# Altium PCB micromouse.PcbDoc (part 1 of 2)
Units mm, origin at the board's own origin, x right, y up, seen from the top; angles counter-clockwise.
Board outline 70.05 x 99.97 mm, 2 copper layers (Top, Bottom); 176 components, 116 nets, 553 pads, 232 vias.
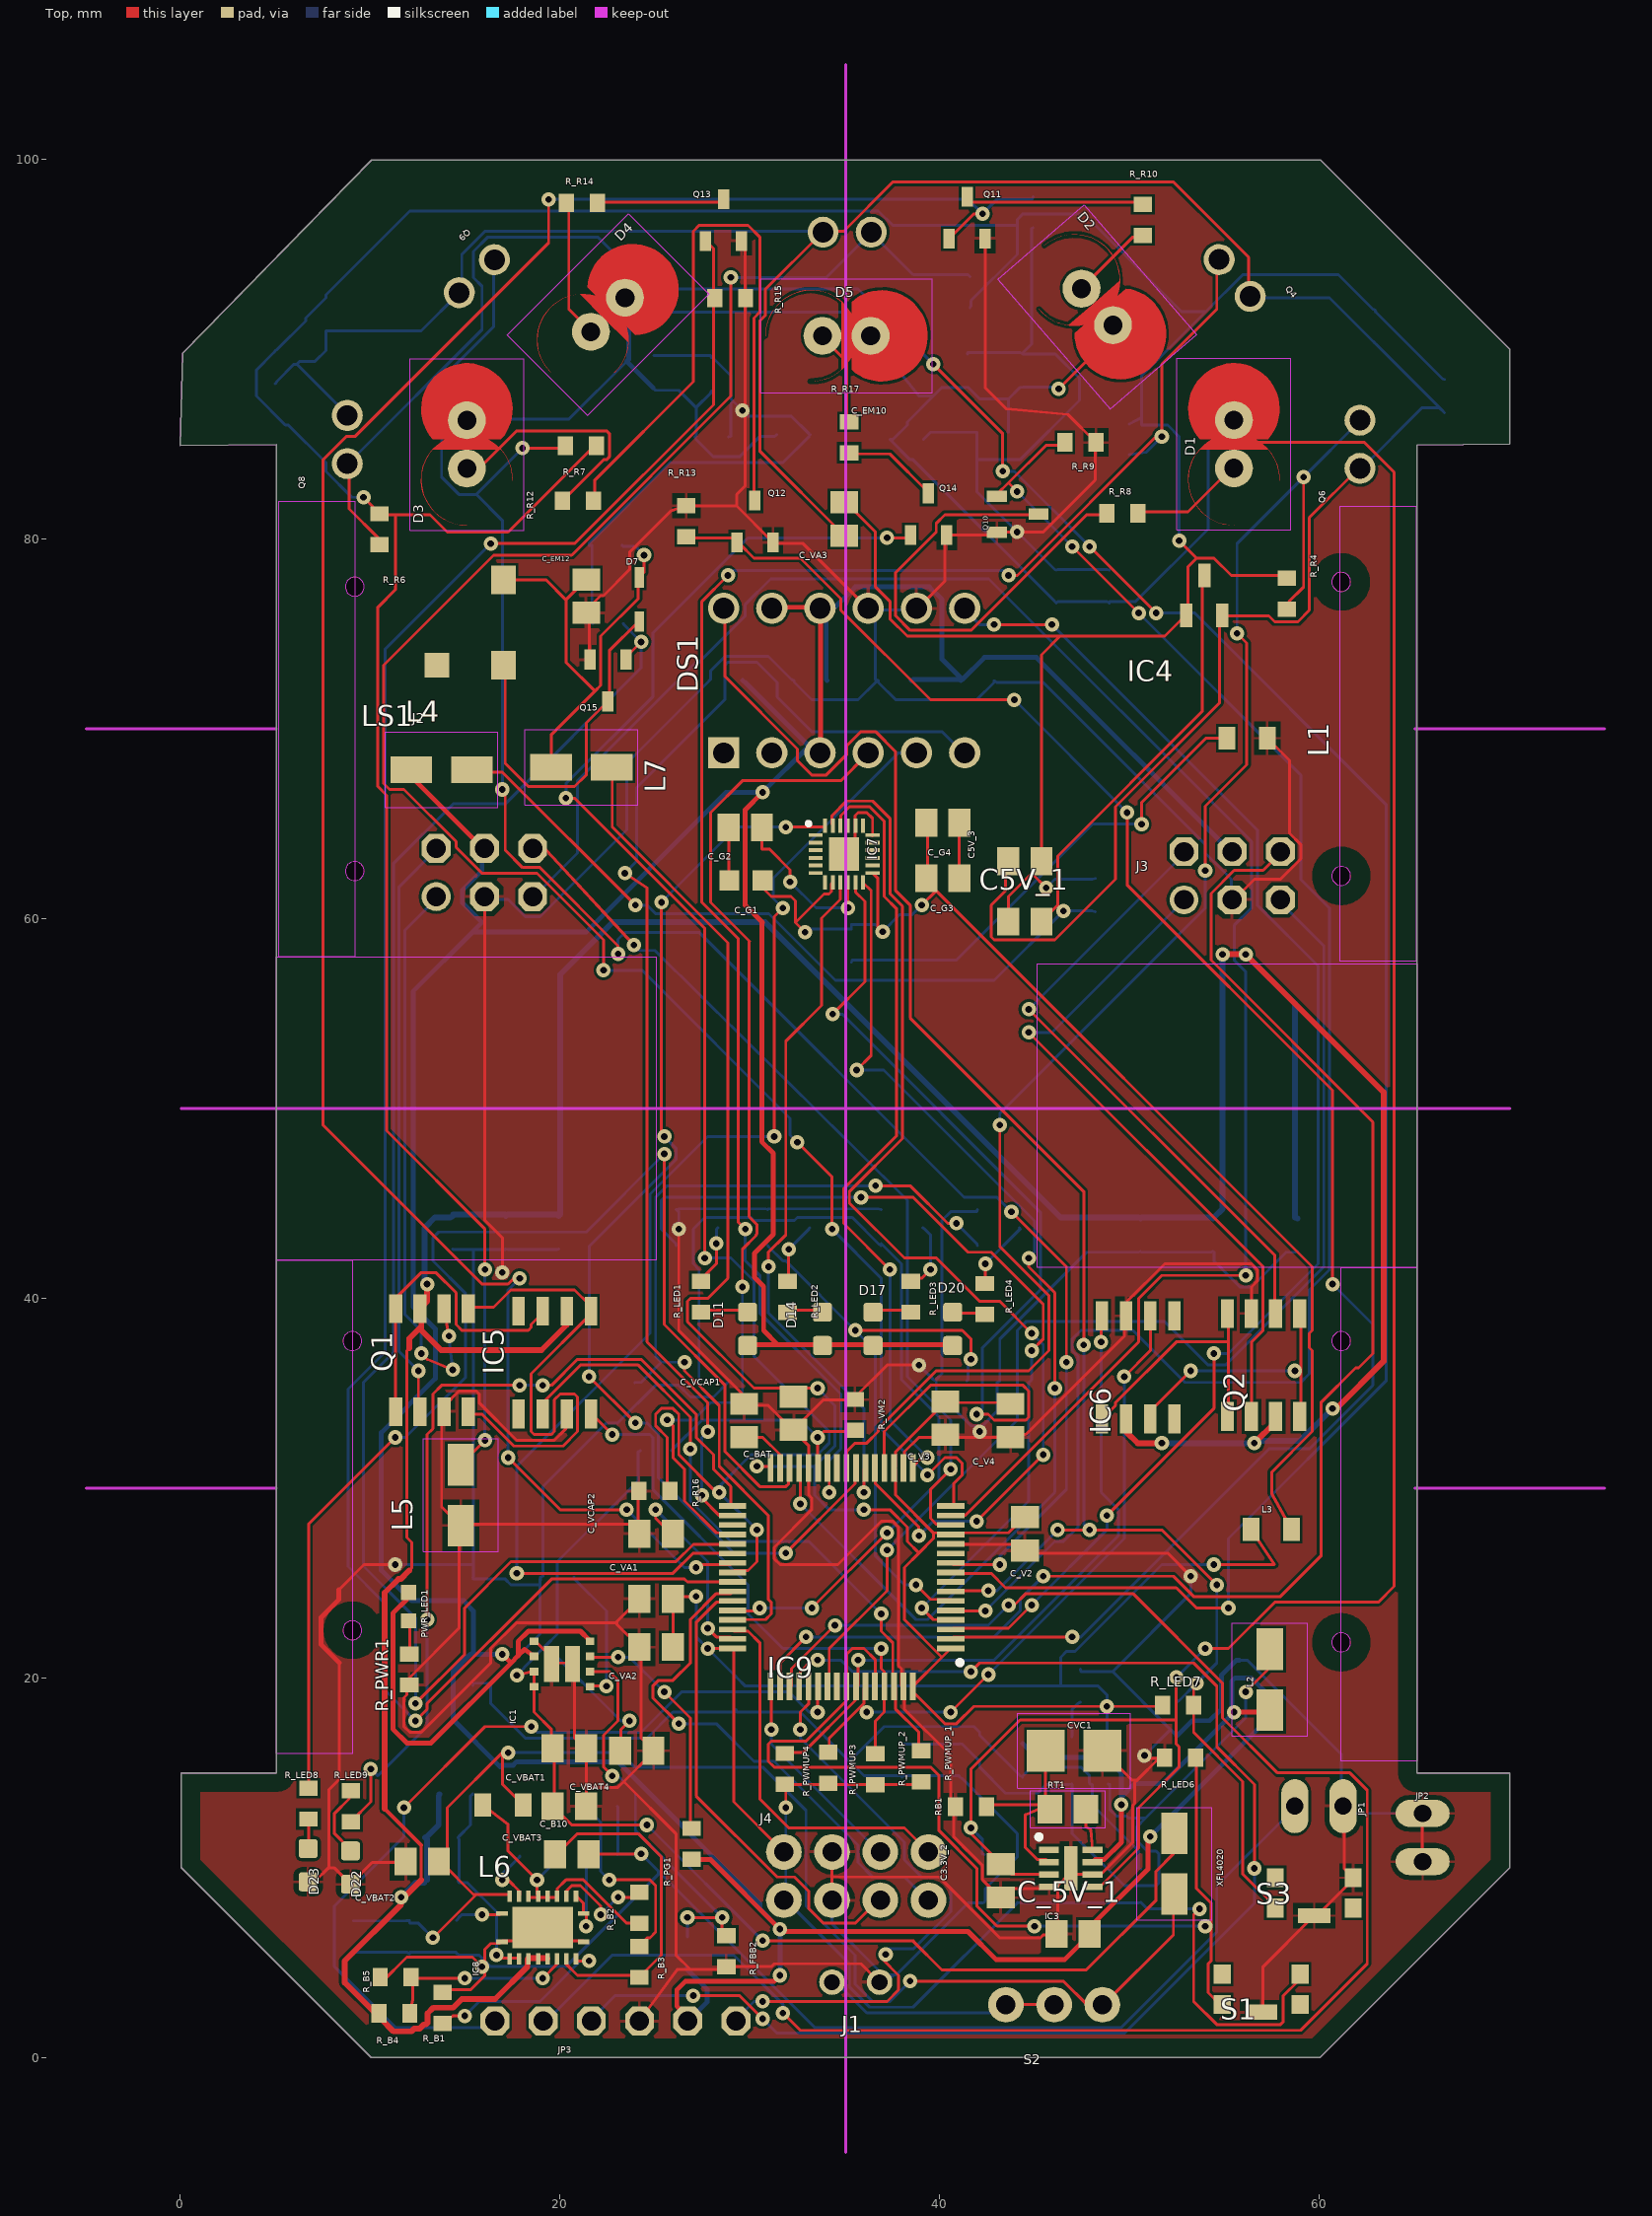
[diagram p0: Top view]
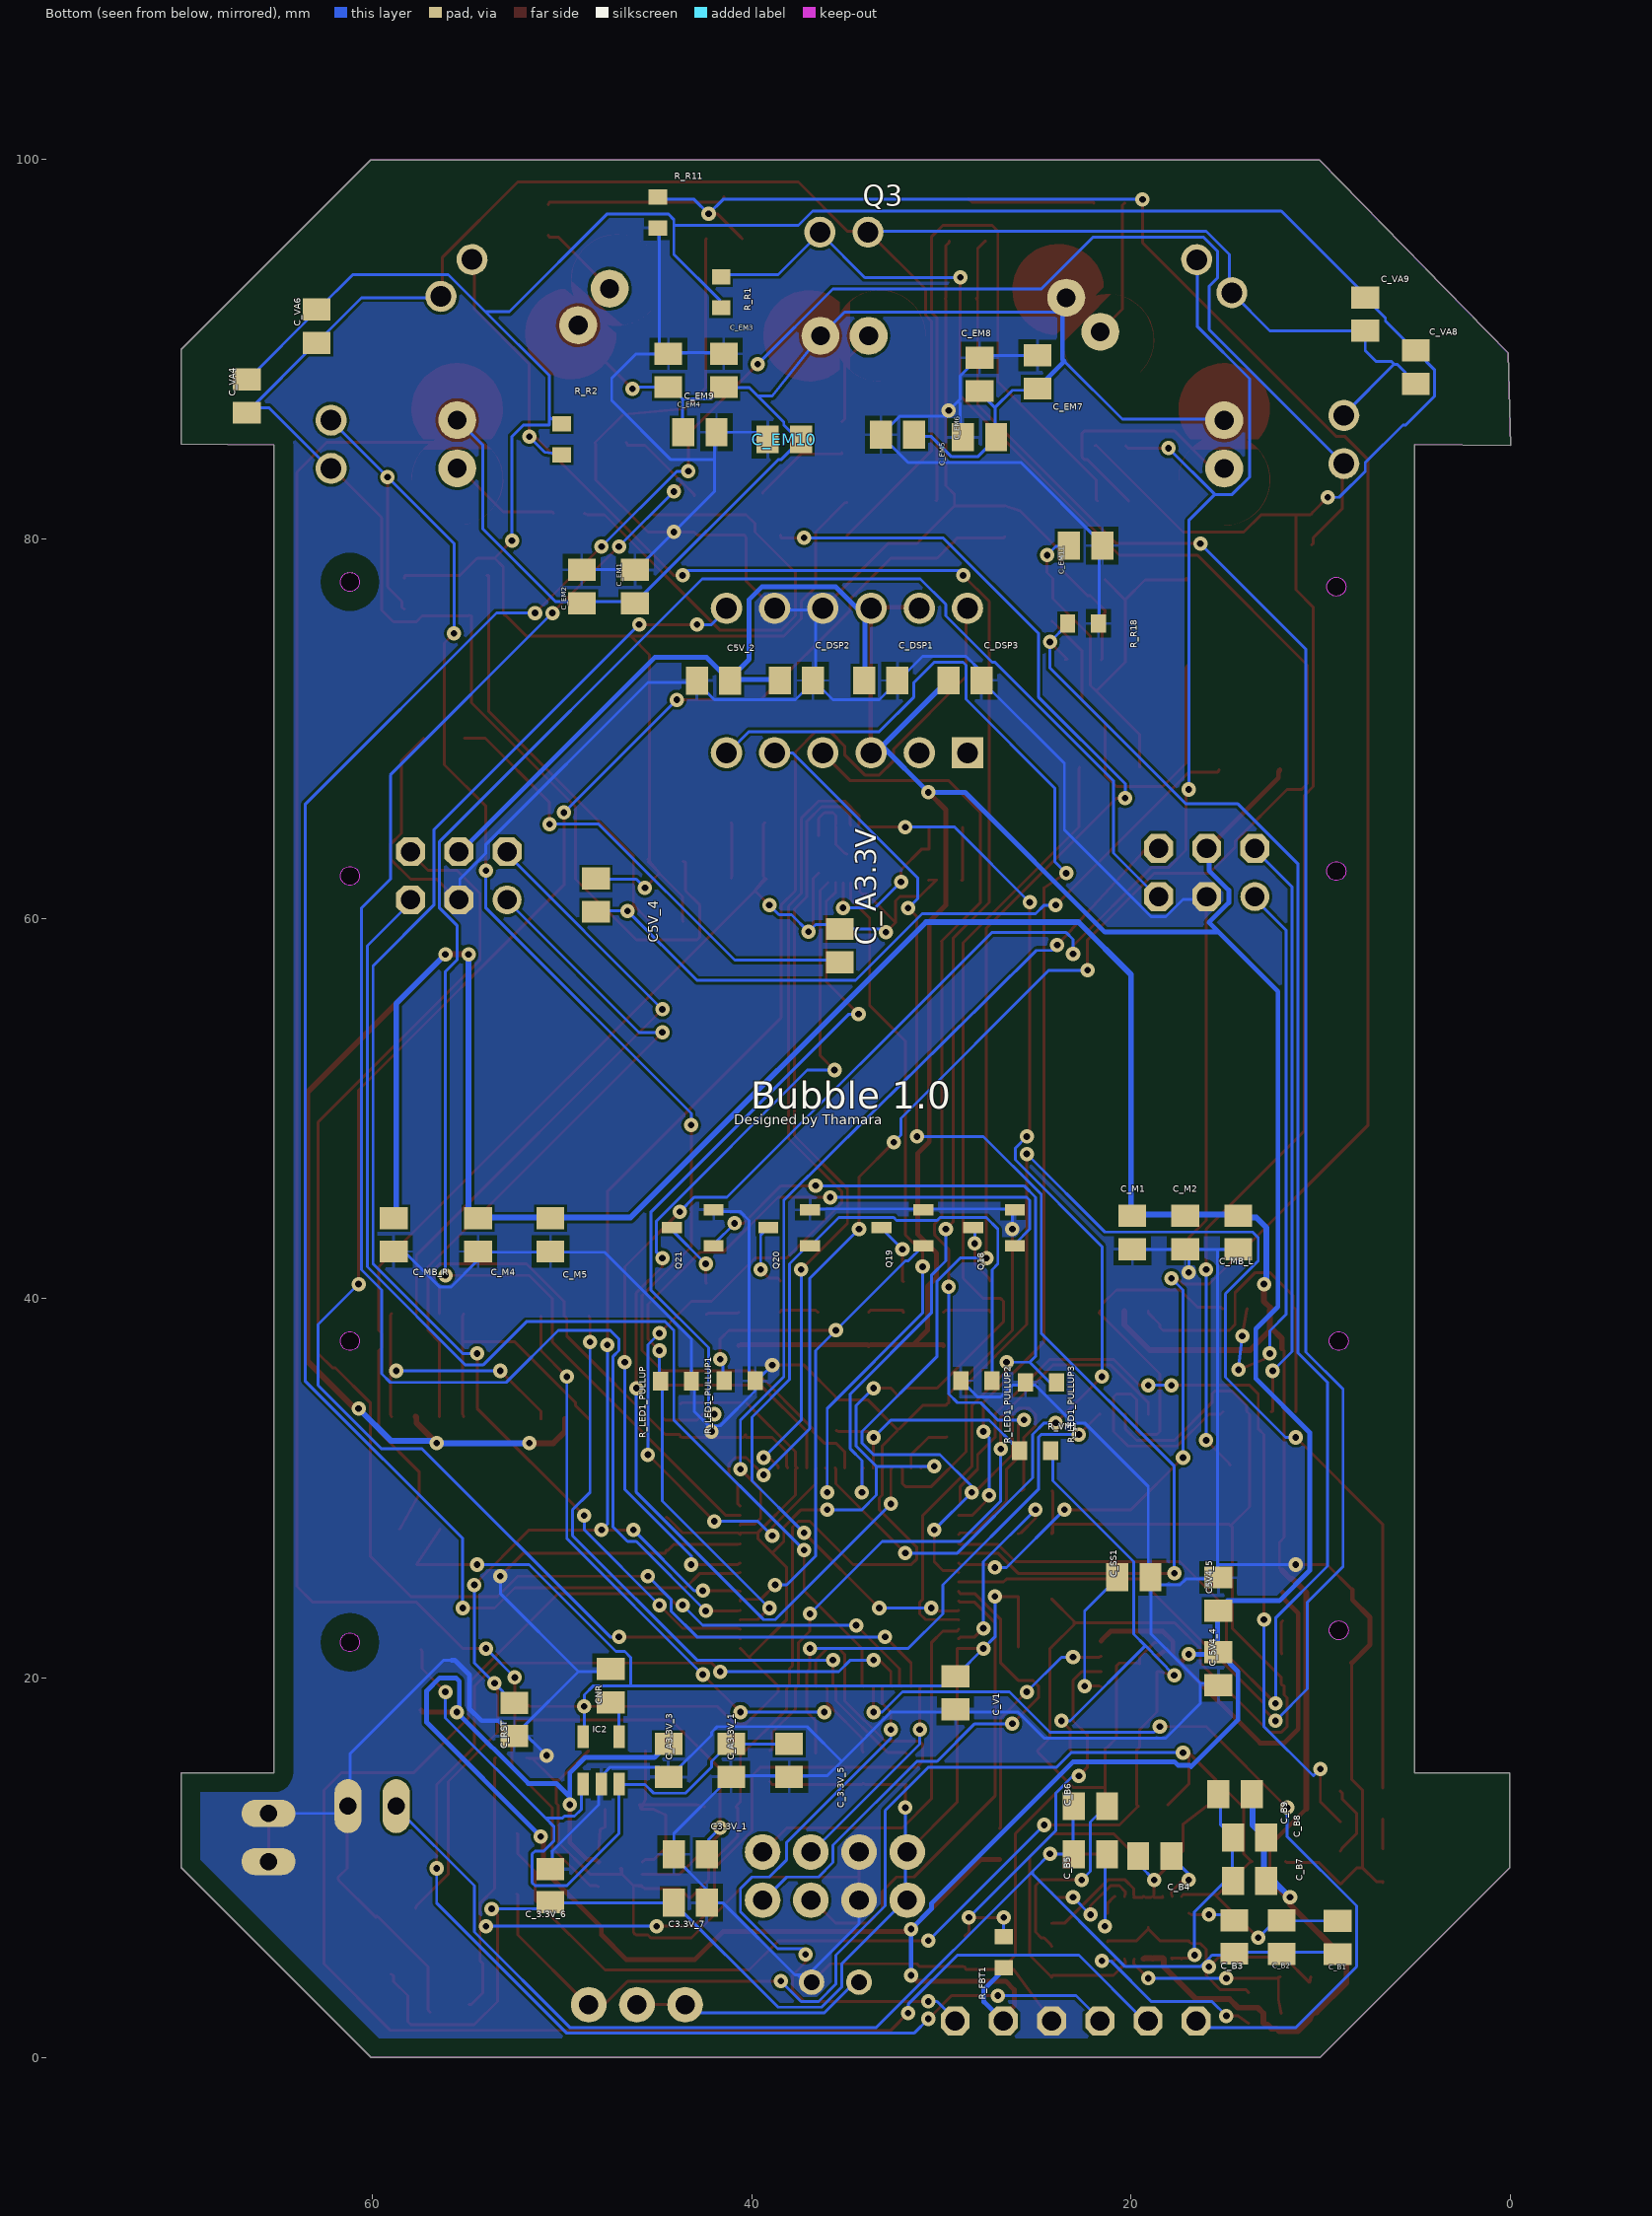
[diagram p1: Bottom view, seen from below]

## Layer stack, top to bottom
Top Solder: solder mask 0.0102, Solder Resist, Dk 3.5
Top: signal copper 0.035
Dielectric 1: dielectric 0.32, FR-4, Dk 4.8
Bottom: signal copper 0.035
Bottom Solder: solder mask 0.0102, Solder Resist, Dk 3.5

## Board outline
5.062,15 0.047,15 0.047,10 10.047,0 60.047,0 70.047,10 70.047,15 65.159,15 65.159,84.953 70.047,85 70.047,90 60.075,99.971 10.075,99.971 0.127,89.797 0,84.928 5.059,84.994
cut-out: 61.159,21.373 ccw(c61.159,21.873) 61.659,21.873 ccw(c61.159,21.873) 61.159,22.373 ccw(c61.159,21.873) 60.659,21.873 ccw(c61.159,21.873)
cut-out: 61.159,37.246 ccw(c61.159,37.746) 61.659,37.746 ccw(c61.159,37.746) 61.159,38.246 ccw(c61.159,37.746) 60.659,37.746 ccw(c61.159,37.746)
cut-out: 9.062,37.246 ccw(c9.062,37.746) 9.562,37.746 ccw(c9.062,37.746) 9.062,38.246 ccw(c9.062,37.746) 8.562,37.746 ccw(c9.062,37.746)
cut-out: 9.062,22.008 ccw(c9.062,22.508) 9.562,22.508 ccw(c9.062,22.508) 9.062,23.008 ccw(c9.062,22.508) 8.562,22.508 ccw(c9.062,22.508)
cut-out: 9.189,76.992 ccw(c9.189,77.492) 9.689,77.492 ccw(c9.189,77.492) 9.189,77.992 ccw(c9.189,77.492) 8.689,77.492 ccw(c9.189,77.492)
cut-out: 9.189,62.008 ccw(c9.189,62.508) 9.689,62.508 ccw(c9.189,62.508) 9.189,63.008 ccw(c9.189,62.508) 8.689,62.508 ccw(c9.189,62.508)
cut-out: 61.159,61.754 ccw(c61.159,62.254) 61.659,62.254 ccw(c61.159,62.254) 61.159,62.754 ccw(c61.159,62.254) 60.659,62.254 ccw(c61.159,62.254)
cut-out: 61.159,77.246 ccw(c61.159,77.746) 61.659,77.746 ccw(c61.159,77.746) 61.159,78.246 ccw(c61.159,77.746) 60.659,77.746 ccw(c61.159,77.746)

## Design rules (kind name [scope] priority, off if disabled: settings)
BoardOutlineClearance mdCopperDimension [All] p1: gap=0.254 ignorepadtopadclearanceinfootprint=FALSE except(0: Arc-SplitContinuation Track-SplitContinuation SMDPad-SplitContinuation THPad-SplitContinuation Via-SplitContinuation Fill-SplitContinuation Poly-SplitContinuation Region-SplitContinuation Text-SplitContinuation; 1.016: Poly-OutlineEdge Poly-CavityEdge Poly-CutoutEdge Poly-SplitBarrior)
Clearance "Clearance (Same Net)" [All] p1: gap=0.152 ignorepadtopadclearanceinfootprint=FALSE
Clearance [All] p2: gap=0.152 ignorepadtopadclearanceinfootprint=FALSE
HoleSize [All] p1: absolutevalues=TRUE maxlimit=2540 minlimit=0.35 maxpercent=80.000 minpercent=20.000
HoleToHoleClearance mdDrill [All] p1: gap=0.152 allowstackedmicrovias=TRUE
MinimumSolderMaskSliver [All] p1 off: minsoldermaskwidth=0.254
PasteMaskExpansion mlMinCreamFrame [All] p1: expansion=0
PolygonConnect PolygonConnect_For_PolygonThermal_ON_Width60000_Gap100000 [InPolygonClass('PolygonThermal_ON_Width60000_Gap100000') vs Not IsVia] p1: connectstyle=Relief reliefconductorwidth=0.152 reliefentries=4 polygonreliefangle="90 Angle" airgapwidth=0.254
PolygonConnect ThermalVias [IsVia] p2: connectstyle=Direct reliefconductorwidth=0.254 reliefentries=4 polygonreliefangle="90 Angle" airgapwidth=0.254
PolygonConnect [All] p3: connectstyle=Relief reliefconductorwidth=0.254 reliefentries=4 polygonreliefangle="90 Angle" airgapwidth=0.254
RoutingVias [All] p1: holewidth=0.35 width=0.756 viastyle="Through Hole" minholewidth=0.35 minwidth=0.756 maxholewidth=2.54 maxwidth=2.54
SolderMaskExpansion mlMinStopFrame [All] p1: expansion=0.102 istentingtop=FALSE
Width [All] p1: maxlimit=0.254 minlimit=0.152 preferedwidth=0.152
26 further rules are at their usual default settings.

## Classes and differential pairs
polygon class PolygonThermal_ON_Width60000_Gap100000: Polygon_1_Net_GND Polygon_2_Net_GND

## Components (designator, comment, footprint, x,y, rotation, side; value= is the part's Value field where it differs from the comment)
C3.3V_1 "0.1uf" CAPC2012X110 43.227,10.701 r180 bottom
C3.3V_2 "47uf" CAPC2012X110 43.227,9.304 r90 top
C3.3V_7 "10uf" CAPC2012X110 43.227,8.161 r0 bottom
C5V4_5 "47uF" CAPC2012X110 15.414,24.417 r90 bottom
C5V_1 "0.1uf" CAPC2012X110 44.497,59.85 r0 top
C5V_2 "0.1uf" CAPC2012X110 41.999,72.54 r180 bottom
C5V_3 "0.1uf" CAPC2012X110 44.497,63.025 r0 top
C5V_4 "0.1uf" CAPC2012X110 48.197,61.243 r270 bottom
C_3.3V_5 "10uf" CAPC2012X110 38.02,15.654 r90 bottom
C_3.3V_6 "0.1uf" CAPC2012X110 50.593,9.05 r270 bottom
C_5V4_4 "0.1uF" CAPC2012X110 15.414,20.48 r90 bottom
C_5V_1 "100uf" CAPC2012X110 47.037,6.51 r0 top
C_A3.3V "2.2uf" CAPC2012X110 35.353,58.58 r90 bottom
C_A3.3V_1 "0.1uf" CAPC2012X110 41.068,15.654 r90 bottom
C_A3.3V_3 "0.1uf" CAPC2012X110 44.37,15.654 r90 bottom
C_B1 "47uf" CAPC2012X110 9.117,6.32 r270 bottom
C_B2 "0.1uf" CAPC2012X110 12.075,6.339 r270 bottom
C_B3 "0.1uf" CAPC2012X110 14.568,6.346 r90 bottom
C_B4 "0.1uf" CAPC2012X110 18.754,10.613 r180 bottom
C_B5 "2.2uf" CAPC2012X110 22.145,10.701 r180 bottom
C_B6 "470 pf" CAPC2012X110 22.145,13.241 r180 bottom
C_B7 "0.1uf" CAPC2012X110 13.763,9.304 r0 bottom
C_B8 "47uf" CAPC2012X110 13.763,11.59 r0 bottom
C_B9 "47uf" CAPC2012X110 14.525,13.876 r0 bottom
C_B10 "22 pf" CAPC2012X110 20.621,10.701 r180 top
C_BAT "2.2uF" CAPC2012X110 32.305,33.942 r270 top
C_DSP1 "10uf" CAPC2012X110 33.194,72.55 r180 bottom
C_DSP2 "0.1uf" CAPC2012X110 37.639,72.55 r180 bottom
C_DSP3 "10uf" CAPC2012X110 28.749,72.55 r180 bottom
C_EM1 "4.7uF" CAPC2012X110 46.148,77.503 r90 bottom
C_EM2 "0.1uF" CAPC2012X110 48.942,77.503 r90 bottom
C_EM3 "0.1uF" CAPC2012X110 41.463,88.886 r90 bottom
C_EM4 "4.7uF" CAPC2012X110 44.384,88.886 r90 bottom
C_EM5 "0.1uF" CAPC2012X110 32.305,85.504 r0 bottom
C_EM6 "4.7uF" CAPC2012X110 27.987,85.377 r0 bottom
C_EM7 "0.1uF" CAPC2012X110 24.939,88.806 r90 bottom
C_EM8 "4.7uF" CAPC2012X110 27.987,88.679 r90 bottom
C_EM9 "4.7uF" CAPC2012X110 42.719,85.631 r180 bottom
C_EM10 "0.1uF" CAPC2012X110 38.274,85.25 r0 bottom
C_EM11 "10uF" CAPC2012X110 22.399,79.662 r180 bottom
C_EM12 "0.1uF" CAPC2012X110 21.383,76.995 r90 top
C_G1 "" C0603K 29.807,62.018 r0 top
C_G2 "0.1uF" CAPC2012X110 29.765,64.803 r180 top
C_G3 "0.1uF" CAPC2012X110 40.179,62.136 r0 top
C_G4 "2.2uF" CAPC2012X110 40.179,65.057 r0 top
C_M1 "0.1uF" CAPC2012X110 19.939,43.467 r270 bottom
C_M2 "4.7uF" CAPC2012X110 17.145,43.467 r90 bottom
C_M4 "4.7uF" CAPC2012X110 54.403,43.34 r90 bottom
C_M5 "0.1uF" CAPC2012X110 50.593,43.34 r270 bottom
C_MB_L "100uF" CAPC2012X110 14.351,43.467 r90 bottom
C_MB_R "100uF" CAPC2012X110 58.848,43.34 r90 bottom
C_RST "0.1uF" CAPC2012X110 52.498,17.813 r270 bottom
C_SS1 "3300pF" CAPC2012X110 19.859,25.306 r0 bottom
C_V1 "0.1uF" CAPC2012X110 29.257,19.21 r90 bottom
C_V2 "0.1uF" CAPC2012X110 44.497,27.592 r270 top
C_V3 "0.1uF" CAPC2012X110 40.306,33.688 r270 top
C_V4 "0.1uF" CAPC2012X110 43.735,33.561 r270 top
C_VA1 "2.2uF" CAPC2012X110 25.066,24.163 r180 top
C_VA2 "0.1uF" CAPC2012X110 25.066,21.623 r180 top
C_VA3 "2.2uF" CAPC2012X110 34.972,81.059 r90 top
C_VA4 "2.2uF" CAPC2012X110 66.595,87.536 r90 bottom
C_VA6 "2.2uF" CAPC2012X110 62.912,91.219 r90 bottom
C_VA8 "2.2uF" CAPC2012X110 5,89.06 r90 bottom
C_VA9 "2.2uF" CAPC2012X110 7.667,91.854 r90 bottom
C_VBAT1 "0.1uf" CAPC2012X110 20.494,16.289 r0 top
C_VBAT2 "0.1uf" CAPC2012X110 12.747,10.32 r180 top
C_VBAT3 "0.1uf" CAPC2012X110 20.494,13.241 r180 top
C_VBAT4 "47uf" CAPC2012X110 24.05,16.162 r180 top
C_VCAP1 "2.2uF" CAPC2012X110 29.709,33.561 r270 top
C_VCAP2 "2.2uF" CAPC2012X110 25.066,27.592 r180 top
CNR "0.1uf" CAPC2012X110 47.418,19.591 r270 bottom
CVC1 "" CT3528 47.088,16.161 r180 top
D1 "SFH_4545" DIO_SFH_4545 55.508,85 r90 top
D2 "SFH_4545" DIO_SFH_4545 48.307,92.235 r310.8 top
D3 "SFH_4545" DIO_SFH_4545 15.099,84.992 r90 top
D4 "SFH_4545" DIO_SFH_4545 22.526,91.821 r45 top
D5 "SFH_4545" DIO_SFH_4545 35.099,90.711 r0 top
D7 "1N4148WSQ-13-F" SOD2513X120N 24.177,76.821 r270 top
D11 "" LED-0603 29.892,38.387 r90 top
D14 "" LED-0603 33.829,38.387 r90 top
D17 "" LED-0603 36.496,38.387 r90 top
D20 "" LED-0603 40.687,38.387 r90 top
D22 "" LED-0603 8.97,10.005 r270 top
D23 "" LED-0603 6.731,10.132 r270 top
DS1 "HCMS-2903" DIPS762W64P254L1778H508Q12N 28.622,68.74 r90 top
IC1 "LMZ21701SILT" LMZ21701SILT 20.113,20.734 r180 top
IC2 "TPS73633MDBVREPG4" SOT95P280X145-5N 47.919,15.651 r90 bottom
IC3 "LMZ10501SILR" SON65P260X300X150-9N 46.91,9.969 r0 top
IC4 "MCP1700T-5002E_TT" SOT95P237X112-3N 53.948,77.04 r90 top
IC5 "UCC27524DR" SOIC127P600X175-8N#1 19.732,36.609 r90 top
IC6 "UCC27524DR" SOIC127P600X175-8N#1 50.466,36.355 r270 top
IC7 "MPU-6500" QFN40P300X300X95-25N 34.972,63.406 r0 top
IC8 "TPS61088RHLT" BQ24031IRHLRQ1 19.097,6.843 r270 top
IC9 "STM32F405RGT6V" QFP50P1200X1200X160-64N 34.845,25.306 r180 top
J1 "3A/250V" B2B-XH-A 34.337,3.97 r0 top
J2 "" MA03-2 16.02,62.434 r0 top
J3 "" MA03-2 55.419,62.263 r0 top
J4 "" 2X4 35.607,9.558 r0 top
JP1 "" JP1 59.991,13.241 r90 top
JP2 "" JP1 65.452,11.59 r0 top
JP3 "" 1X06 22.923,1.923 r180 top
L1 "10 uH" INDC2009X120 56.199,69.511 r180 top
L2 "4.7 uH" L4035M 57.406,19.905 r90 top
L3 "10uH" INDC2009X120 57.475,27.832 r0 top
L4 "4.7 uH" L4035M 13.763,67.851 r0 top
L5 "4.7 uH" L4035M 14.779,29.624 r90 top
L6 "2.2 uH" INDC2009X120 16.998,13.306 r180 top
L7 "4.7 uH" L4035M 21.129,67.978 r0 top
LS1 "SMT-0540-S-R" SMT0540SR 15.414,75.598 r90 top
PWR_LED1 "GREEN" CHIPLED_0603 12.018,23.754 r180 top
Q1 "ZXMHC3F381N8TC" SOIC127P600X175-8N#2 13.255,36.736 r90 top
Q2 "ZXMHC3F381N8TC" SOIC127P600X175-8N#2 57.07,36.482 r270 top
Q3 "TEFT4300" TEFT4300 35.131,96.171 r180 bottom
Q4 "TEFT4300" TEFT4300 55.546,93.759 r310.1 top
Q6 "TEFT4300" TEFT4300 62.15,84.996 r270 top
Q8 "TEFT4300" TEFT4300 8.796,85.246 r90 top
Q9 "TEFT4300" TEFT4300 15.621,93.853 r223.2 top
Q10 "SSM3K324R" SOT95P240X88-3N 44.116,81.313 r0 top
Q11 "SSM3K324R" SOT95P240X88-3N 41.449,96.934 r90 top
Q12 "SSM3K324R" SOT95P240X88-3N 30.273,80.932 r90 top
Q13 "SSM3K324R" SOT95P240X88-3N 28.622,96.807 r90 top
Q14 "SSM3K324R" SOT95P240X88-3N 39.417,81.313 r90 top
Q15 "SSM3K324R" SOT95P240X88-3N 22.526,72.55 r270 top
Q18 "SSM3K324R" SOT95P240X88-3N 27.225,43.721 r0 bottom
Q19 "SSM3K324R" SOT95P240X88-3N 32.051,43.721 r0 bottom
Q20 "SSM3K324R" SOT95P240X88-3N 38.02,43.721 r0 bottom
Q21 "SSM3K324R" SOT95P240X88-3N 43.1,43.721 r0 bottom
R_B1 "100K" RESC1608X60 13.819,2.612 r270 top
R_B2 "150K" RESC1608X60 24.182,7.882 r90 top
R_B3 "35.7K" RESC1608X60 24.186,5.039 r270 top
R_B4 "94.65K" RESC1608X60 11.276,2.319 r180 top
R_B5 "10K" RESC1608X60 11.344,4.237 r0 top
R_FBB2 "10k" RESC1608X60 28.764,5.596 r90 top
R_FBT1 "52.5K" RESC1608X60 26.717,5.547 r270 bottom
R_LED1 "330 ohm" RESC1608X60 27.433,40.088 r270 top
R_LED1_PULLUP "10k" RESC1608X60 43.986,35.635 r0 bottom
R_LED1_PULLUP1 "10k" RESC1608X60 40.618,35.653 r0 bottom
R_LED1_PULLUP2 "10k" RESC1608X60 28.155,35.66 r180 bottom
R_LED1_PULLUP3 "10k" RESC1608X60 24.754,35.562 r180 bottom
R_LED2 "330 ohm" RESC1608X60 31.996,40.074 r270 top
R_LED3 "330 ohm" RESC1608X60 38.491,40.088 r270 top
R_LED4 "330 ohm" RESC1608X60 42.382,39.961 r270 top
R_LED6 "47K" RESC1608X60 52.666,15.793 r180 top
R_LED7 "330 ohm" RESC1608X60 52.567,18.559 r0 top
R_LED8 "1K" RESC1608X60 6.752,13.376 r270 top
R_LED9 "1K" RESC1608X60 8.982,13.235 r270 top
R_PG1 "10K" RESC1608X60 26.931,11.25 r90 top
R_PWMUP3 "10k" RESC1608X60 34.128,15.267 r270 top
R_PWMUP4 "10k" RESC1608X60 31.842,15.201 r270 top
R_PWMUP_1 "10k" RESC1608X60 39.036,15.347 r270 top
R_PWMUP_2 "10k" RESC1608X60 36.616,15.192 r270 top
R_PWR1 "1K" RESC1608X60 12.063,20.446 r90 top
R_R1 "4.7k" RESC1608X60 41.602,93.009 r90 bottom
R_R2 "1.8k" RESC1608X60 50.003,85.256 r270 bottom
R_R4 "1.8k" RESC1608X60 58.295,77.128 r270 top
R_R6 "1.8k" RESC1608X60 10.491,80.515 r270 top
R_R7 "1.8k" RESC1608X60 21.107,84.918 r180 top
R_R8 "0.75 ohm" RESC1608X60 49.627,81.356 r0 top
R_R9 "10k" RESC1608X60 47.419,85.095 r180 top
R_R10 "0.75 ohm" RESC1608X60 50.709,96.819 r270 top
R_R11 "10k" RESC1608X60 44.932,97.213 r90 bottom
R_R12 "0.75 ohm" RESC1608X60 20.953,82.015 r180 top
R_R13 "10k" RESC1608X60 26.654,80.949 r270 top
R_R14 "0.75 ohm" RESC1608X60 21.15,97.709 r180 top
R_R15 "10k" RESC1608X60 28.968,92.697 r180 top
R_R16 "10k" RESC1608X60 24.978,29.853 r0 top
R_R17 "0.75 ohm" RESC1608X60 35.241,85.365 r90 top
R_R18 "10k" RESC1608X60 22.532,75.553 r0 bottom
R_VM1 "4.7k" RESC1608X60 25.063,31.965 r180 bottom
R_VM2 "10k" RESC1608X60 35.531,33.854 r270 top
RB1 "115K" RESC1608X60 41.65,13.21 r0 top
RT1 "223K" R0805 46.764,13.081 r0 top
S1 "KMR211G" KMR211G 56.943,3.589 r180 top
S2 "" SWITCH_SPDT_PTH_11.6X4.0MM 46.037,2.78 r90 top
S3 "KMR211G" KMR211G 59.737,8.669 r180 top
XFL4020 "4.7 uH" L4035M 52.373,10.209 r270 top

## Footprints (in the part's own frame and the unit in brackets; to place one, negate y for a bottom-side part, rotate by r counter-clockwise, add the part's x,y. Pads: shape width x height; smd on the part's side, far side on the other; paste and mask are expansions set on the pad)
1X06 [mil] "1X06"
  oct 60x60 / inner round 55.43 / far side oct 60x60 hole 40: 1(-250,0) 2(-150,0) 3(-50,0) 4(50,0) 5(150,0) 6(250,0)
2X4 [mil] "2X4"
  round 74 hole 40: 1(-150,-50) 2(-150,50) 3(-50,-50) 4(-50,50) 5(50,-50) 6(50,50) 7(150,-50) 8(150,50)
B2B-XH-A [mm] "B2B-XH-A"
  round 1.348 hole 0.84: 1(0,0) 2(2.5,0)
BQ24031IRHLRQ1 [mm] "BQ24031IRHLRQ1"
  rect 0.24x0.6 smd: 1(-0.75,2.15) 10(-0.75,-2.15) 11(0.75,-2.15) 20(0.75,2.15)
  rect 0.6x0.24 smd: 2(-1.65,1.75) 3(-1.65,1.25) 4(-1.65,0.75) 5(-1.65,0.25) 6(-1.65,-0.25) 7(-1.65,-0.75) 8(-1.65,-1.25) 9(-1.65,-1.75) 12(1.65,-1.75) 13(1.65,-1.25) 14(1.65,-0.75) 15(1.65,-0.25) 16(1.65,0.25) 17(1.65,0.75) 18(1.65,1.25) 19(1.65,1.75)
  rect 2.19x3.19 smd: 21(0,0)
C0603K [mm] "C0603K"
  rect 1.05x1.08 smd: 1(-0.875,0) 2(0.875,0)
CAPC2012X110 [mm] "CAPC2012X110"
  rect 1.165x1.465 smd: 1(-0.875,0) 2(0.875,0)
CHIPLED_0603 [mil] "CHIPLED_0603"
  rect 31.5x31.5 smd: A(0,-29.53) C(0,29.53)
CT3528 [mm] "CT3528"
  rect 2x2.2 smd: +(-1.5,0) -(1.5,0)
  Top keep-out lines w0.051: 2.973,1.983 2.973,-1.983 -2.973,-1.983 -2.973,1.983 2.973,1.983
DIO_SFH_4545 [mm] "DIO_SFH_4545"
  round 2 hole 1: A(1.27,0) C(-1.27,0)
  Top region: 0.269,0.06 0.269,1.79 1.012,2.247 1.87,2.401 1.87,2.401 1.895,2.401 3.041,2.093 3.9,1.275 4.266,0.147 4.266,0.147 4.127,-0.808 3.624,-1.632 2.838,-2.193 1.895,-2.4 1.895,-2.4 1.895,-2.4 1.918,-2.4 1.034,-2.256 0.269,-1.79 0.269,-1.79
  Top region: -0.269,0.06 -0.269,1.79 -1.012,2.247 -1.87,2.401 -1.87,2.401 -1.895,2.401 -3.083,2.068 -3.951,1.191 -4.271,0 -4.27,0 -4.01,1.098 -3.277,1.957 -2.234,2.388 -1.109,2.297 -0.149,1.703 0.435,0.737 0.515,-0.389 0.073,-1.428 -0.794,-2.151 -1.895,-2.401 -1.895,-2.401 -1.895,-2.401 -1.918,-2.4 -1.034,-2.256 -0.269,-1.79 -0.269,-1.79
  Top keep-out lines w0.05: -4.52,3 4.52,3 4.52,-3 -4.52,-3 -4.52,3
DIPS762W64P254L1778H508Q12N [mm] "DIPS762W64P254L1778H508Q12N"
  rect 1.65x1.65 / inner round 1.524 / far side rect 1.65x1.65 hole 1.1: 1(0,0)
  round 1.65 hole 1.1: 2(0,-2.54) 3(0,-5.08) 4(0,-7.62) 5(0,-10.16) 6(0,-12.7) 7(7.62,-12.7) 8(7.62,-10.16) 9(7.62,-7.62) 10(7.62,-5.08) 11(7.62,-2.54) 12(7.62,0)
INDC2009X120 [mm] "INDC2009X120"
  rect 0.876x1.21 smd: 1(-1.067,0) 2(1.067,0)
JP1 [mil] "JP1"
  oval 112x56 hole 36: 1(0,-50) 2(0,50)
KMR211G [mil] "KMR211G"
  rect 35.43x39.37 smd: 1(80.71,31.5) 2(80.71,-31.5) 3(-80.71,31.5) 4(-80.71,-31.5)
  rect 66.93x31.5 smd: 5(0,47.24)
L4035M [mm] "L4035M"
  rect 2.2x1.4 smd: 1(-1.6,0) 2(1.6,0)
  Top keep-out lines w0.051: -2.973,1.983 -2.973,-1.983 2.973,-1.983 2.973,1.983 -2.973,1.983
LED-0603 [mm] "LED-0603"
  rrect30% 1x1 smd: A(-0.877,0) C(0.877,0)
LMZ21701SILT [mil] "LMZ21701SILT"
  rect 17.72x15.75 smd: 1(-58.07,47.24) 2(-58.07,15.75) 3(-58.07,-15.75) 4(-58.07,-47.24) 5(58.07,-47.24) 6(58.07,-15.75) 7(58.07,15.75) 8(58.07,47.24)
  rect 31.5x74.8 smd: 9(21.65,0) 10(-21.65,0)
MA03-2 [mil] "MA03-2"
  round 60 hole 40: 1(-100,-50)
  oct 60x60 / inner round 55.43 / far side oct 60x60 hole 40: 2(-100,50) 3(0,-50) 4(0,50) 5(100,-50) 6(100,50)
QFN40P300X300X95-25N [mm] "QFN40P300X300X95-25N"
  rect 0.75x0.2 smd: 1(-1.5,1) 2(-1.5,0.6) 3(-1.5,0.2) 4(-1.5,-0.2) 5(-1.5,-0.6) 6(-1.5,-1) 13(1.5,-1) 14(1.5,-0.6) 15(1.5,-0.2) 16(1.5,0.2) 17(1.5,0.6) 18(1.5,1)
  rect 0.2x0.75 smd: 7(-1,-1.5) 8(-0.6,-1.5) 9(-0.2,-1.5) 10(0.2,-1.5) 11(0.6,-1.5) 12(1,-1.5) 19(1,1.5) 20(0.6,1.5) 21(0.2,1.5) 22(-0.2,1.5) 23(-0.6,1.5) 24(-1,1.5)
  rect 1.59x1.75 smd: 25(0,0)
  silkscreen extent -1.97,1.5 -1.77,1.7
QFP50P1200X1200X160-64N [mm] "QFP50P1200X1200X160-64N"
  rect 1.45x0.3 smd: 1(-5.75,3.75) 2(-5.75,3.25) 3(-5.75,2.75) 4(-5.75,2.25) 5(-5.75,1.75) 6(-5.75,1.25) 7(-5.75,0.75) 8(-5.75,0.25) 9(-5.75,-0.25) 10(-5.75,-0.75) 11(-5.75,-1.25) 12(-5.75,-1.75) 13(-5.75,-2.25) 14(-5.75,-2.75) 15(-5.75,-3.25) 16(-5.75,-3.75) 33(5.75,-3.75) 34(5.75,-3.25) 35(5.75,-2.75) 36(5.75,-2.25) 37(5.75,-1.75) 38(5.75,-1.25) 39(5.75,-0.75) 40(5.75,-0.25) 41(5.75,0.25) 42(5.75,0.75) 43(5.75,1.25) 44(5.75,1.75) 45(5.75,2.25) 46(5.75,2.75) 47(5.75,3.25) 48(5.75,3.75)
  rect 0.3x1.45 smd: 17(-3.75,-5.75) 18(-3.25,-5.75) 19(-2.75,-5.75) 20(-2.25,-5.75) 21(-1.75,-5.75) 22(-1.25,-5.75) 23(-0.75,-5.75) 24(-0.25,-5.75) 25(0.25,-5.75) 26(0.75,-5.75) 27(1.25,-5.75) 28(1.75,-5.75) 29(2.25,-5.75) 30(2.75,-5.75) 31(3.25,-5.75) 32(3.75,-5.75) 49(3.75,5.75) 50(3.25,5.75) 51(2.75,5.75) 52(2.25,5.75) 53(1.75,5.75) 54(1.25,5.75) 55(0.75,5.75) 56(0.25,5.75) 57(-0.25,5.75) 58(-0.75,5.75) 59(-1.25,5.75) 60(-1.75,5.75) 61(-2.25,5.75) 62(-2.75,5.75) 63(-3.25,5.75) 64(-3.75,5.75)
  silkscreen extent -6.35,4.38 -6.1,4.62
R0805 [mm] "R0805"
  rect 1.3x1.5 smd: 1(-0.95,0) 2(0.95,0)
  Top keep-out lines w0.051: -1.973,-0.983 -1.973,0.983 1.973,0.983 1.973,-0.983 -1.973,-0.983
RESC1608X60 [mm] "RESC1608X60"
  rect 0.799x0.974 smd: 1(-0.815,0) 2(0.815,0)
SMT0540SR [mm] "SMT0540SR"
  rect 1.5x1.3 smd: 1(-2.25,-1.6) 2(2.25,-1.6)
  rect 1.3x1.3 smd: 3(-2.25,1.9)
SOD2513X120N [mm] "SOD2513X120N"
  rect 1.075x0.5 smd: 1(-1.162,0) 2(1.162,0)
SOIC127P600X175-8N#1 [mm] "SOIC127P600X175-8N"
  rect 1.528x0.65 smd: 1(-2.711,1.905) 2(-2.711,0.635) 3(-2.711,-0.635) 4(-2.711,-1.905) 5(2.711,-1.905) 6(2.711,-0.635) 7(2.711,0.635) 8(2.711,1.905)
SOIC127P600X175-8N#2 [mm] "SOIC127P600X175-8N"
  rect 1.525x0.7 smd: 1(-2.712,1.905) 2(-2.712,0.635) 3(-2.712,-0.635) 4(-2.712,-1.905) 5(2.712,-1.905) 6(2.712,-0.635) 7(2.712,0.635) 8(2.712,1.905)
SON65P260X300X150-9N [mm] "SON65P260X300X150-9N"
  rect 1.05x0.35 smd: 1(-1.15,0.975) 2(-1.15,0.325) 3(-1.15,-0.325) 4(-1.15,-0.975) 5(1.15,-0.975) 6(1.15,-0.325) 7(1.15,0.325) 8(1.15,0.975)
  rect 0.7x2.35 smd: 9(0,0)
  silkscreen extent -1.8,1.53 -1.55,1.77
SOT95P237X112-3N [mm] "SOT95P237X112-3N"
  rect 1.25x0.65 smd: 1(-1.05,0.95) 2(-1.05,-0.95) 3(1.05,0)
SOT95P240X88-3N [mm] "SOT95P240X88-3N"
  rect 1.05x0.6 smd: 1(-1.1,0.95) 2(-1.1,-0.95) 3(1.1,0)
SOT95P280X145-5N [mm] "SOT95P280X145-5N"
  rect 1.2x0.6 smd: 1(-1.25,0.95) 2(-1.25,0) 3(-1.25,-0.95) 4(1.25,-0.95) 5(1.25,0.95)
SWITCH_SPDT_PTH_11.6X4.0MM [mil] "SWITCH_SPDT_PTH_11.6X4.0MM"
  round 74 hole 40: 1(0,100) 2(0,0) 3(0,-100)
TEFT4300 [mm] "TEFT4300"
  round 1.635 hole 1.09: 1(-1.27,0) 2(1.27,0)

## Part data
C3.3V_1 C3.3V_2 C3.3V_7 C5V4_5 C5V_1 C5V_2 C5V_3 C5V_4 C_3.3V_5 C_3.3V_6 C_5V4_4 C_5V_1 C_A3.3V C_A3.3V_1 C_A3.3V_3 C_B1 C_B2 C_B3 C_B4 C_B5 C_B6 C_B7 C_B8 C_B9 C_B10 C_BAT C_DSP1 C_DSP2 C_DSP3 C_EM1 C_EM2 C_EM3 C_EM4 C_EM5 C_EM6 C_EM7 C_EM8 C_EM9 C_EM10 C_EM11 C_EM12 C_G2 C_G3 C_G4 C_M1 C_M2 C_M4 C_M5 C_MB_L C_MB_R C_RST C_SS1 C_V1 C_V2 C_V3 C_V4 C_VA1 C_VA2 C_VA3 C_VA4 C_VA6 C_VA8 C_VA9 C_VBAT1 C_VBAT2 C_VBAT3 C_VBAT4 C_VCAP1 C_VCAP2 CNR: library part CAPC2012X110, PackageName=CAPC2012X110
C_G1: library part C0603K, PackageName=C0603K
CVC1: library part CT3528, PackageName=CT3528
D1 D2 D3 D4 D5: library part DIO_SFH_4545, PackageName=DIO_SFH_4545
D7: library part SOD2513X120N, PackageName=SOD2513X120N
D11 D14 D17 D20 D22 D23: library part LED-0603, PackageName=LED-0603
DS1: library part DIPS762W64P254L1778H508Q12N, PackageName=DIPS762W64P254L1778H508Q12N
IC2: library part SOT95P280X145-5N, PackageName=SOT95P280X145-5N
IC3: library part SON65P260X300X150-9N, PackageName=SON65P260X300X150-9N
IC4: library part SOT95P237X112-3N, PackageName=SOT95P237X112-3N
IC5 IC6 Q1 Q2: library part SOIC127P600X175-8N, PackageName=SOIC127P600X175-8N
IC7: library part QFN40P300X300X95-25N, PackageName=QFN40P300X300X95-25N
IC8: library part BQ24031IRHLRQ1, PackageName=BQ24031IRHLRQ1
IC9: library part QFP50P1200X1200X160-64N, PackageName=QFP50P1200X1200X160-64N
J1: library part B2B-XH-A, PackageName=B2B-XH-A
J2 J3: library part MA03-2, PackageName=MA03-2
J4: library part 2X4, PackageName=2X4
JP1 JP2: library part JP1, PackageName=JP1
JP3: library part 1X06, PackageName=1X06
L1 L3 L6: library part INDC2009X120, PackageName=INDC2009X120
L2 L4 L5 L7 XFL4020: library part L4035M, PackageName=L4035M
LS1: library part SMT0540SR, PackageName=SMT0540SR
PWR_LED1: library part CHIPLED_0603, PackageName=CHIPLED_0603
Q10 Q11 Q12 Q13 Q14 Q15 Q18 Q19 Q20 Q21: library part SOT95P240X88-3N, PackageName=SOT95P240X88-3N
R_B1 R_B2 R_B3 R_B4 R_B5 R_FBB2 R_FBT1 R_LED1 R_LED1_PULLUP R_LED1_PULLUP1 R_LED1_PULLUP2 R_LED1_PULLUP3 R_LED2 R_LED3 R_LED4 R_LED6 R_LED7 R_LED8 R_LED9 R_PG1 R_PWMUP3 R_PWMUP4 R_PWMUP_1 R_PWMUP_2 R_PWR1 R_R1 R_R2 R_R4 R_R6 R_R7 R_R8 R_R9 R_R10 R_R11 R_R12 R_R13 R_R14 R_R15 R_R16 R_R17 R_R18 R_VM1 R_VM2 RB1: library part RESC1608X60, PackageName=RESC1608X60
RT1: library part R0805, PackageName=R0805
S2: library part SWITCH_SPDT_PTH_11.6X4.0MM, PackageName=SWITCH_SPDT_PTH_11.6X4.0MM
IC1: PackageName=LMZ21701SILT
Q3 Q4 Q6 Q8 Q9: PackageName=TEFT4300
S1 S3: PackageName=KMR211G

## Free pads (board coordinates)
  round 1 hole 1 unplated: MH1(9.189,62.508) MH2(9.189,77.492) MH3(61.159,77.746) MH4(61.159,62.254) MH5(61.159,37.746) MH6(61.159,21.873) MH7(9.062,22.508) MH8(9.062,37.746)

## Via types
v1: diameter 0.756/0.756 (per signal layer), hole 0.35, Top to Bottom, 232 vias

## Nets (pads, with @x,y where several pads share a name; then routed paths per layer and width w, separated by ;. In a path a pad name is that pad's centre, name@x,y a point inside that pad or via, vN(x,y) a via of type N, cw(c..) or ccw(c..) an arc to the next point about the centre after c; other vN are vias at no path point)
2V: C3.3V_1.2 C3.3V_2.2 C_EM1.1 C_EM2.1 C_EM3.1 C_EM4.1 C_EM5.1 C_EM6.1 C_EM7.1 C_EM8.1 C_EM9.1 C_EM10.1 D1.A D2.A D3.A D4.A D5.A IC3.3 IC3.5 | length 207.3
  Top w0.152: IC3.3@45.76,9.644 45.615,9.66 43.786,9.66 43.329,10.117 C3.3V_2.2@43.227,10.179 43.176,10.269 41.652,11.793 v1(41.652,12.098) 41.652,15.197 44.243,17.788 52.473,17.788 ; v1(46.275,87.917) 49.137,90.779 D2.A@49.137,91.274 ; IC3.5@48.06,8.994 48.205,9.05 48.51,9.05 50.491,11.031 50.491,13.165 52.625,15.298 52.625,16.365 52.473,16.518 52.473,17.788 ; v1(52.473,20.023) 52.473,17.788 ; v1(53.997,21.547) 55.216,21.547 57.654,23.985 63.111,23.985 63.953,24.827 63.953,83.523 62.379,85.098 56.587,85.098 55.521,86.164 D1.A@55.508,86.27
  Bottom w0.152: D3.A@15.099,86.262 15.135,86.317 20.469,86.317 23.517,89.365 ; C_EM7.1@24.888,87.993 C_EM7.1@24.939,87.931 25.041,87.841 26.26,87.841 27.174,86.926 ; C_EM8.1@27.987,87.804 27.936,87.688 27.174,86.926 ; C_EM5.1@31.43,85.504 31.289,85.402 30.527,85.402 29.46,84.336 28.089,84.336 27.174,85.25 C_EM6.1@27.112,85.377 27.174,85.402 27.174,86.926 ; v1(41.652,12.098) 42.262,11.488 42.262,10.726 C3.3V_1.2@42.352,10.701 ; C_EM9.1@43.594,85.631 43.633,85.631 43.633,87.384 ; v1(46.275,87.917) 46.148,88.044 46.021,88.044 45.987,88.01 C_EM4.1@44.384,88.01 44.243,87.993 43.633,87.384 ; v1(52.473,20.023) v1(53.997,21.547) ; D1.A@55.508,86.27 55.368,86.164 54.149,84.945 54.149,80.526 50.339,76.716 48.967,76.716 C_EM2.1@48.942,76.628 48.815,76.716 46.224,76.716 C_EM1.1@46.148,76.628 46.072,76.716 38.604,84.183 38.452,84.183 37.385,85.25 C_EM10.1@37.399,85.25 37.537,85.25 38.299,86.012 38.299,86.164 39.671,87.536 ; D4.A@23.517,91.956 D4.A@23.424,92.719 23.517,92.718 D4.A@23.517,91.956 ; D4.A@23.517,91.956 23.617,91.956 35.099,91.956 36.318,90.736 D5.A@36.369,90.711 38.909,87.536 39.671,87.536 ; 39.671,87.536 40.128,87.993 41.347,87.993 C_EM3.1@41.463,88.01 41.5,87.993 42.109,87.384 43.633,87.384
  Bottom w0.254: D4.A@23.617,91.956 23.617,89.465 23.517,89.365 C_EM7.1@24.888,87.993
3.3V: C3.3V_7.2 C_3.3V_6.2 C_BAT.1 C_V1.2 C_V2.1 C_V3.1 C_V4.1 C_VA1.1 C_VA2.1 IC2.5 IC9.1 IC9.13 IC9.19 IC9.32 IC9.48 IC9.64 J4.1 J4.2 L3.1 L7.2 R_LED7.1 R_PWMUP3.2 R_PWMUP4.2 R_PWMUP_1.2 R_PWMUP_2.2 S1.4 | length 217.8
  Top w0.152: L7.2@22.729,67.978 22.755,67.876 22.755,64.828 28.851,58.732 28.851,41.054 27.784,39.987 26.869,39.987 26.717,39.835 26.717,38.768 30.222,35.263 31.899,35.263 32.203,34.958 C_BAT.1@32.305,34.817 32.356,34.958 32.661,35.263 v1(33.575,35.263) ; C_VA2.1@25.941,21.623 25.955,21.699 25.955,24.138 C_VA1.1@25.941,24.163 25.955,24.29 v1(27.174,24.29) ; v1(27.784,21.547) 29.003,21.547 IC9.48@29.095,21.556 29.155,21.547 29.155,13.47 J4.2@31.797,10.828 ; v1(30.375,31.148) 30.984,31.148 IC9.32@31.095,31.056 ; R_PWMUP4.2@31.842,14.386 R_PWMUP4.2@31.899,14.384 ; v1(31.899,13.165) R_PWMUP4.2@31.899,14.384 ; v1(36.013,28.862) 37.385,28.862 38.299,27.948 38.299,27.186 38.909,26.576 ; R_PWMUP_1.2@39.036,14.532 38.909,14.384 36.623,14.384 R_PWMUP_2.2@36.616,14.377 36.471,14.384 34.185,14.384 R_PWMUP3.2@34.128,14.452 34.032,14.384 R_PWMUP4.2@31.899,14.384 ; IC9.1@40.595,21.556 40.585,21.547 40.128,21.09 ; C_V4.1@43.735,34.436 43.633,34.501 40.433,34.501 C_V3.1@40.306,34.563 40.281,34.501 37.69,31.91 37.69,31.148 IC9.19@37.595,31.056 37.69,30.996 37.69,29.624 39.671,27.643 ; C_V2.1@44.497,28.467 44.395,28.405 43.633,27.643 40.738,27.643 IC9.13@40.595,27.556 40.585,27.643 39.671,27.643 ; R_LED7.1@51.752,18.559 51.711,18.499 v1(48.815,18.499) 41.805,18.499 40.89,17.584 40.281,17.584 38.604,19.261 38.604,19.413 IC9.64@38.595,19.556 38.604,19.566 40.128,21.09 ; v1(53.692,7.831) 53.387,7.526 53.387,2.954 54.606,1.735 57.959,1.735 58.111,1.887 58.111,3.259 58.873,4.021 58.873,4.326 S1.4@58.993,4.389 ; v1(54.454,25.966) 57.644,25.966 L3.1@56.407,27.832 ; 38.909,26.576 39.671,27.338 39.671,27.643 ; 38.909,26.576 38.147,25.814 38.147,23.071 40.128,21.09
  Bottom w0.152: v1(27.174,24.29) 27.174,22.156 v1(27.784,21.547) 29.155,20.175 C_V1.2@29.257,20.085 29.308,20.023 29.765,19.566 46.377,19.566 ; v1(30.375,31.148) 33.423,31.148 ; J4.1@31.797,8.288 J4.1@31.899,8.288 ; v1(31.899,13.165) 31.899,10.879 J4.2@31.797,10.828 31.899,10.726 J4.1@31.899,8.288 ; v1(33.575,35.263) 34.489,34.348 34.489,32.215 33.423,31.148 ; v1(36.013,28.862) 34.185,28.862 33.423,29.624 33.423,31.148 ; IC2.5@48.869,16.901 48.815,16.975 v1(48.815,18.499) 48.815,19.108 48.358,19.566 46.377,19.566 ; v1(53.692,7.831) 50.949,7.831 50.644,8.136 C_3.3V_6.2@50.593,8.175 50.491,8.136 44.243,8.136 C3.3V_7.2@44.102,8.161 44.091,8.136 38.604,2.649 36.318,2.649 35.251,3.716 35.251,4.935 J4.1@31.899,8.288 ; v1(54.454,25.966) 51.711,25.966 47.139,21.394 46.681,21.394 46.377,21.09 46.377,19.566
3.3V_RE: C5V_3.1 C_VA3.1 C_VA4.1 C_VA6.1 C_VA8.1 C_VA9.1 IC4.2 Q3.2 Q4.2 Q6.2 Q8.2 Q9.2 | length 145.2
  Top w0.152: C_VA3.1@34.972,80.184 34.947,80.221 30.527,84.64 30.527,91.498 30.832,91.803 30.832,93.175 33.727,96.07 Q3.2@33.861,96.171 33.88,96.223 34.947,96.223 37.537,98.814 52.32,98.814 56.283,94.851 56.283,92.87 Q4.2@56.364,92.787 ; C5V_3.1@43.622,63.025 43.481,63 43.481,61.476 42.719,60.714 42.719,59.037 42.871,58.885 46.072,58.885 49.272,62.085 49.272,65.895 54.759,71.382 54.759,75.954 IC4.2@54.898,75.99 54.911,75.954 57.349,75.954 57.654,75.649 58.873,75.649 59.483,76.258 59.483,81.135 62.074,83.726 Q6.2@62.15,83.726
  Bottom w0.152: C_VA8.1@5,88.185 5.076,88.298 5.991,89.212 6.143,89.212 ; Q8.2@8.796,86.516 8.734,86.622 6.143,89.212 ; Q9.2@14.695,92.984 12.69,90.978 C_VA9.1@7.667,90.979 7.667,89.93 7.107,89.37 6.3,89.37 6.143,89.212 ; Q9.2@14.83,93.022 14.83,95.004 16.049,96.223 33.727,96.223 Q3.2@33.861,96.171 ; Q4.2@56.364,92.787 56.435,92.718 60.55,92.718 62.836,90.432 C_VA6.1@62.912,90.344 62.988,90.279 66.493,86.774 C_VA4.1@66.595,86.661 66.327,86.928 65.429,86.928 62.226,83.726 Q6.2@62.15,83.726
  Bottom w0.254: Q9.2@14.695,92.984 14.734,93.022 Q9.2@14.83,93.022
5V: C5V4_5.1 C5V_2.2 C_5V4_4.2 C_5V_1.2 C_A3.3V_3.2 C_DSP1.1 C_DSP2.1 C_DSP3.1 D11.A D14.A D17.A D20.A DS1.3 DS1.10 DS1.11 IC1.4 IC1.6 IC3.7 J2.4 J3.4 JP3.2 L2.1 L4.1 PWR_LED1.A R_FBT1.2 R_PG1.1 | length 304.3
  Top w0.254: PWR_LED1.A@12.018,24.504 11.934,24.442 11.934,24.138 11.198,23.401 11.198,17.305 11.934,16.568 13.204,16.568 17.421,20.785 ; L4.1@12.163,67.851 12.239,67.724 12.239,67.419 15.897,63.762 J2.4@16.02,63.704 ; v1(16.963,21.242) 17.421,20.785 ; IC1.6@18.638,21.134 18.132,21.497 17.802,21.166 ; IC1.4@21.588,21.934 21.535,22.004 21.078,22.461 18.335,22.461 17.802,21.928 17.802,21.166 ; JP3.2@26.733,1.923 26.717,2.04 26.717,2.141 26.158,2.7 26.158,3.564 26.615,4.021 31.289,4.021 v1(31.594,4.326) ; R_PG1.1@26.931,10.435 27.022,10.422 27.936,10.422 v1(31.594,6.764) 31.721,6.637 41.5,6.637 42.973,5.164 46.605,5.164 47.901,6.459 C_5V_1.2@47.912,6.51 47.912,6.852 50.974,9.914 50.974,11.514 v1(51.101,11.641) ; D11.A@29.892,37.51 29.917,37.549 31.491,37.549 ; 30.679,59.799 30.631,59.847 ; v1(30.679,66.657) 29.765,65.743 29.765,60.714 30.631,59.847 ; DS1.11@31.162,76.36 31.289,76.411 33.575,76.411 DS1.10@33.702,76.36 33.727,76.258 33.727,68.791 DS1.3@33.702,68.74 ; D20.A@40.687,37.51 40.585,37.549 36.623,37.549 D17.A@36.496,37.51 36.471,37.549 33.88,37.549 D14.A@33.829,37.51 33.727,37.549 31.491,37.549 ; IC3.7@48.06,10.294 48.205,10.422 48.663,10.422 49.577,11.336 v1(49.577,13.317) ; v1(55.521,18.194) 57.349,18.194 L2.1@57.406,18.305 ; 17.421,20.785 17.802,21.166 ; 30.631,59.847 30.631,48.249 31.237,47.644 31.237,43.364 30.248,42.375 30.248,41.105 30.729,40.623 30.729,38.311 31.491,37.549
  Bottom w0.254: J2.4@16.02,63.704 15.897,63.609 15.897,62.542 14.855,61.501 14.855,60.841 15.897,59.799 15.389,59.291 ; v1(16.963,21.242) 15.439,21.242 C_5V4_4.2@15.414,21.355 ; R_FBT1.2@26.717,4.732 26.717,4.63 27.758,3.589 27.758,2.929 26.869,2.04 JP3.2@26.733,1.923 ; C_DSP3.1@29.624,72.55 29.765,72.448 DS1.3@33.118,69.096 ; v1(31.594,4.326) v1(31.594,6.764) 30.527,7.831 30.527,8.11 23.054,15.583 17.721,15.583 17.54,15.403 16.915,15.403 16.836,15.324 14.373,17.788 14.373,20.328 15.287,21.242 C_5V4_4.2@15.414,21.355 ; C_DSP1.1@34.069,72.55 34.032,72.601 DS1.10@34.032,75.954 ; C_DSP2.1@38.514,72.55 38.604,72.601 41.043,72.601 C5V_2.2@41.124,72.54 C5V_2.2@41.195,72.601 ; C_A3.3V_3.2@44.37,16.529 44.395,16.518 45.107,15.806 48.764,15.806 49.577,14.994 v1(49.577,13.317) 49.577,13.73 50.287,14.44 51.766,14.44 v1(55.521,18.194) 55.394,18.321 55.394,19.82 55.571,19.997 56.435,19.997 57.121,19.312 57.121,17.661 v1(51.101,11.641) ; J3.4@55.419,63.533 55.368,63.609 55.267,63.609 45.107,73.769 42.363,73.769 C5V_2.2@41.195,72.601 ; 15.389,59.291 12.264,56.167 12.264,39.555 13.433,38.387 13.433,35.771 10.588,32.926 10.588,25.662 12.188,24.061 14.938,24.061 C5V4_5.1@15.414,23.542 15.439,23.528 15.439,21.394 C_5V4_4.2@15.414,21.355 ; 15.389,59.291 21.383,59.291 28.749,66.657 v1(30.679,66.657) DS1.3@33.118,69.096 ; DS1.3@33.118,69.096 DS1.3@33.702,68.74 33.575,68.638 DS1.3@33.118,69.096 ; DS1.10@34.032,75.954 DS1.10@33.702,76.36 33.727,76.258 DS1.10@34.032,75.954 ; DS1.10@34.032,75.954 35.556,77.478 39.468,77.478 40.127,76.818 40.127,73.669 C5V_2.2@41.195,72.601
A3.3V: C_A3.3V.2 C_G1.2 C_G3.1 C_G4.1 IC7.8 IC7.13 L3.2 | length 67.4
  Top w0.152: C_G1.2@30.682,62.018 30.264,62.043 31.137,61.171 32.178,61.171 32.407,60.942 32.407,59.799 ; v1(32.915,59.291) 32.407,59.799 ; IC7.8@34.372,61.906 34.3,61.835 34.3,61.436 34.167,61.302 33.91,61.302 32.407,59.799 ; IC7.13@36.472,62.406 36.753,62.125 36.75,62.096 36.75,59.571 v1(37.004,59.317) ; v1(39.061,60.714) C_G3.1@39.823,61.476 ; C_G4.1@39.304,65.057 39.366,64.981 39.366,62.238 C_G3.1@39.304,62.136 ; L3.2@58.542,27.832 57.502,29.695 57.502,30.843 59.635,32.977 59.635,37.244 59.483,37.396 59.483,38.158 59.635,38.311 59.635,41.664 C_G3.1@39.823,61.476 ; C_G3.1@39.304,62.136 C_G3.1@39.823,61.476 ; C_G3.1@39.304,62.136 39.214,62.085 C_G3.1@39.823,61.476
  Bottom w0.152: v1(32.915,59.291) 33.079,59.455 C_A3.3V.2@35.353,59.455 35.353,59.698 36.623,59.698 v1(37.004,59.317) 37.893,60.206 38.553,60.206 v1(39.061,60.714)
AGND2: C5V_1.1 C5V_3.2 C5V_4.1 C_VA3.2 C_VA4.2 C_VA6.2 C_VA8.2 C_VA9.2 IC4.1 L5.2 R_R1.1 R_R2.1 R_R4.1 R_R6.1 R_R7.1 | length 225.6
  Top w0.152: v1(9.648,82.202) 10.41,81.44 R_R6.1@10.491,81.33 10.563,81.288 11.325,81.288 ; L5.2@14.779,31.224 14.83,31.3 v1(16.049,32.52) ; v1(16.049,41.511) 16.049,43.645 10.867,48.826 10.867,66.505 10.41,66.962 10.41,76.411 11.325,77.325 11.325,81.288 ; R_R7.1@21.922,84.918 21.84,84.945 17.268,80.373 14.068,80.373 13.153,81.288 11.325,81.288 ; C_VA3.2@34.972,81.934 35.099,81.897 36.623,80.373 36.623,77.478 37.385,76.716 37.385,75.801 38.299,74.887 46.35,74.887 ; C5V_1.1@43.622,59.85 43.633,59.952 43.633,61.171 C5V_3.2@44.853,62.39 ; C5V_3.2@45.462,63.152 C5V_3.2@45.372,63.025 ; v1(45.615,61.628) C5V_3.2@44.853,62.39 ; v1(52.625,79.916) 53.539,79.002 ; R_R4.1@58.295,77.943 58.264,78.087 55.368,78.087 54.454,79.002 53.539,79.002 ; C5V_3.2@44.853,62.39 C5V_3.2@45.372,63.025 ; C5V_3.2@44.853,62.39 45.462,63 C5V_3.2@45.372,63.025 ; C5V_3.2@45.372,63.025 45.372,73.909 46.35,74.887 ; 46.35,74.887 51.863,74.887 52.93,75.954 IC4.1@52.998,75.99 53.082,76.106 53.082,78.544 53.539,79.002
  Bottom w0.152: v1(9.648,82.202) 9.039,82.202 7.667,83.574 7.667,84.031 5.686,86.012 5.533,86.012 4.009,87.536 4.009,88.908 4.924,89.822 C_VA8.2@5,89.935 5.076,89.974 6.6,91.498 6.6,91.651 7.667,92.718 C_VA9.2@7.667,92.729 7.667,92.87 12.087,97.29 36.775,97.29 37.537,96.528 44.091,96.528 ; v1(16.049,32.52) v1(16.049,41.511) ; R_R1.1@41.602,92.194 41.652,92.26 41.652,92.565 44.091,95.004 44.091,96.528 ; v1(45.615,61.628) 46.072,62.085 48.053,62.085 C5V_4.1@48.197,62.118 ; R_R2.1@50.003,86.071 50.644,86.398 ; v1(52.625,79.916) 52.625,85.402 52.015,86.012 50.644,86.012 50.644,86.398 ; C_VA4.2@66.595,88.411 66.493,88.45 62.988,91.956 C_VA6.2@62.912,92.094 62.836,92.108 61.007,93.937 55.978,93.937 54.024,91.983 ; 44.091,96.528 44.091,96.832 44.395,97.137 45.207,97.137 45.462,97.137 47.6,97.137 52.754,91.983 54.024,91.983 ; 50.644,86.398 50.644,88.603 54.024,91.983
BOOT0: IC9.57 IC9.60 R_LED6.1 S1.1 | length 55.3
  Top w0.152: IC9.60@36.595,19.556 36.623,19.566 36.623,20.937 36.013,21.547 35.404,21.547 35.099,21.242 35.099,19.566 IC9.57@35.095,19.556 35.099,19.413 35.099,18.804 32.965,16.67 31.137,16.67 30.984,16.518 30.984,15.603 31.289,15.298 39.519,15.298 39.976,14.841 39.976,11.946 41.957,9.964 41.957,7.983 43.024,6.916 v1(45.005,6.916) ; R_LED6.1@53.481,15.793 53.539,15.756 53.539,8.898 54.301,8.136 v1@54.301,6.916 ; v1(53.997,6.916) v1@54.301,6.916 ; S1.1@54.893,2.789 54.759,2.802 54.149,3.411 54.149,4.935 54.301,5.088 v1@54.301,6.916
  Bottom w0.152: v1(45.005,6.916) v1(53.997,6.916)
BT_MODE: IC9.53 JP3.1 | length 31.9
  Top w0.152: v1(30.679,2.954) 37.233,2.954 37.842,3.564 37.842,4.326 37.017,5.151 37.16,5.295 v1(37.16,5.424) ; v1(32.661,17.28) 32.661,18.194 33.118,18.651 33.118,19.413 IC9.53@33.095,19.556
  Bottom w0.152: JP3.1@29.273,1.923 29.308,2.04 30.222,2.954 v1(30.679,2.954) ; v1(32.661,17.28) 32.661,16.822 38.147,11.336 38.147,10.422 39.061,9.507 39.976,9.507 40.585,8.898 40.585,7.678 38.63,5.723 37.282,5.723 v1(37.16,5.424)
BT_MS: IC9.54 JP3.6 | length 46.2
  Top w0.152: v1(11.782,13.165) 16.049,17.432 v1(18.487,17.432) ; v1(33.575,18.194) 33.575,19.413 IC9.54@33.595,19.556
  Bottom w0.152: v1(11.782,13.165) 11.782,11.641 8.124,7.983 8.124,4.783 11.325,1.582 16.201,1.582 16.506,1.887 JP3.6@16.573,1.923 ; v1(18.487,17.432) 18.792,17.127 24.279,17.127 26.412,19.261 32.051,19.261 33.118,18.194 v1(33.575,18.194)
BT_RX: IC9.51 JP3.5 | length 95.7
  Top w0.152: v1(31.746,2.344) 32.661,1.43 59.026,1.43 62.531,4.935 62.531,14.079 61.617,14.994 57.807,14.994 54.911,17.889 54.911,19.718 50.187,24.442 44.548,24.442 43.938,23.833 v1(43.633,23.833) ; IC9.51@32.095,19.556 32.203,19.566 32.203,20.48 v1(34.489,22.766)
  Bottom w0.152: JP3.5@19.113,1.923 19.249,1.887 22.755,5.392 29.155,5.392 31.746,2.802 v1(31.746,2.344) ; v1(34.489,22.766) 42.567,22.766 v1(43.633,23.833)
BT_TX: IC9.52 JP3.4 | length 75.4
  Top w0.152: v1(27.022,3.259) 29.46,3.259 v1(30.679,2.04) ; IC9.52@32.595,19.556 32.661,19.566 32.661,20.328 33.27,20.937 v1(33.575,20.937) ; v1(41.652,20.328) 42.109,20.785 53.387,20.785 54.606,19.566 54.606,16.365 56.587,14.384 v1(56.587,9.964)
  Bottom w0.152: JP3.4@21.653,1.923 21.688,2.04 22.907,3.259 v1(27.022,3.259) ; v1(30.679,2.04) 31.441,1.278 49.729,1.278 56.587,8.136 v1(56.587,9.964) ; v1(33.575,20.937) 34.794,20.937 35.404,20.328 v1(41.652,20.328)
BUZZER: IC9.37 Q15.1 R_R18.2 | length 89.1
  Top w0.152: v1(12.391,18.651) 14.982,21.242 14.982,23.68 17.421,26.119 26.107,26.119 27.022,27.033 29.003,27.033 IC9.37@29.095,27.056 ; Q15.1@23.476,73.65 23.364,73.668 v1(24.279,74.582)
  Bottom w0.152: v1(12.391,18.651) 12.391,23.147 9.648,25.89 9.648,35.568 11.223,37.142 11.223,62.898 14.373,66.048 17.116,66.048 24.279,73.21 v1(24.279,74.582) 23.364,75.496 R_R18.2@23.347,75.553
CE: DS1.7 IC9.3 | length 73.9
  Top w0.152: IC9.3@40.595,22.556 40.738,22.614 43.633,22.614 v1(44.853,23.833) ; v1(42.871,75.496) v1(45.919,75.496) ; v1(48.815,28.557) 54.454,34.196 v1(54.454,37.092)
  Bottom w0.152: DS1.7@41.322,76.36 41.347,76.258 42.109,75.496 v1(42.871,75.496) ; v1(44.853,23.833) 48.815,27.795 v1(48.815,28.557) ; v1(45.919,75.496) 56.74,64.676 56.74,60.714 59.94,57.513 59.94,41.816 55.216,37.092 v1(54.454,37.092)
CLK: DS1.6 IC9.34 | length 65.3
  Top w0.152: v1(23.419,62.396) 24.583,61.628 24.583,37.701 27.784,34.501 v1(27.784,32.977) ; v1(27.479,29.624) 27.479,29.472 28.393,28.557 29.003,28.557 IC9.34@29.095,28.556
  Bottom w0.152: v1(23.419,62.396) 24.032,63.01 24.032,66.893 28.698,71.559 28.698,73.363 28.851,73.515 30.375,73.515 31.441,72.448 31.441,71.686 33.27,69.858 40.128,69.858 41.195,68.791 DS1.6@41.322,68.74 ; v1(27.479,29.624) 27.479,32.672 v1(27.784,32.977)
DATA_IN: DS1.4 IC9.36 | length 54
  Top w0.152: v1(25.65,33.586) 25.955,33.282 25.955,31.605 26.565,30.996 26.565,29.319 28.241,27.643 29.003,27.643 IC9.36@29.095,27.556 ; v1(29.613,40.597) 29.613,42.578 30.326,43.291 30.326,43.347 30.372,43.393 30.372,43.896 29.967,44.301 29.967,58.835 ; 29.994,58.809 29.967,58.835 ; DS1.4@36.242,68.74 36.166,68.638 34.794,67.267 29.613,67.267 27.936,65.59 27.936,60.866 29.939,58.862 29.967,58.835
  Bottom w0.152: v1(25.65,33.586) 27.022,33.586 27.936,34.501 29.155,34.501 29.613,34.958 v1(29.613,40.597)
DC_GND: C_B1.2 C_B2.2 C_B3.1 C_B5.1 C_B6.1 C_B10.1 IC8.11 IC8.20 IC8.21 JP1.2 R_B1.1 R_B5.1 | length 86.8
  Top w0.152: R_B5.1@10.529,4.237 10.597,3.954 11.934,5.291 15.389,5.291 v1(15.897,4.783) v1@16.049,4.783 ; R_B1.1@13.819,3.427 13.941,3.564 15.287,3.564 16.049,4.326 v1@16.049,4.783 ; IC8.21@19.097,6.843 IC8.21@19.097,6.764 ; IC8.20@21.247,6.093 21.231,6.154 19.707,6.154 IC8.21@19.097,6.764 ; C_B10.1@21.496,10.701 21.535,10.726 v1(24.279,10.726) ; v1@16.049,4.783 16.049,5.697 16.354,6.002 16.811,6.002 IC8.11@16.947,6.093 16.963,6.154 18.487,6.154 IC8.21@19.097,6.764
  Bottom w0.152: C_B1.2@9.117,5.444 9.191,5.545 11.934,5.545 C_B2.2@12.075,5.464 12.087,5.545 14.525,5.545 C_B3.1@14.568,5.471 14.677,5.392 15.744,5.392 15.897,5.24 ; v1(15.897,4.783) 15.897,5.24 ; C_B5.1@23.02,10.701 C_B5.1@23.059,10.726 ; C_B6.1@23.02,13.241 23.059,13.165 C_B5.1@23.059,10.726 ; JP1.2@58.721,13.241 58.721,13.165 54.606,9.05 54.606,6.612 49.577,1.582 33.423,1.582 25.193,9.812 ; 15.897,5.24 16.354,4.783 20.316,4.783 25.193,9.66 25.193,9.812 ; C_B5.1@23.059,10.726 v1(24.279,10.726) 25.193,9.812
FANPWM: IC9.56
FSYNC: IC7.11 IC9.20 | length 50.1
  Top w0.152: v1(34.362,54.973) 36.064,56.675 36.064,60.906 35.572,61.398 IC7.11@35.572,61.906 ; IC9.20@37.095,31.056 37.08,31.148 37.08,32.977 39.519,35.415 44.395,35.415 44.7,35.11 44.7,33.739 44.548,33.586 42.871,33.586 42.567,33.891 v1(41.957,33.891)
  Bottom w0.152: v1(34.362,54.973) 34.87,54.973 45.31,44.534 45.31,40.444 42.262,37.396 42.262,34.196 v1(41.957,33.891)